# EAGLE board bot (EAGLE 9.6.0)
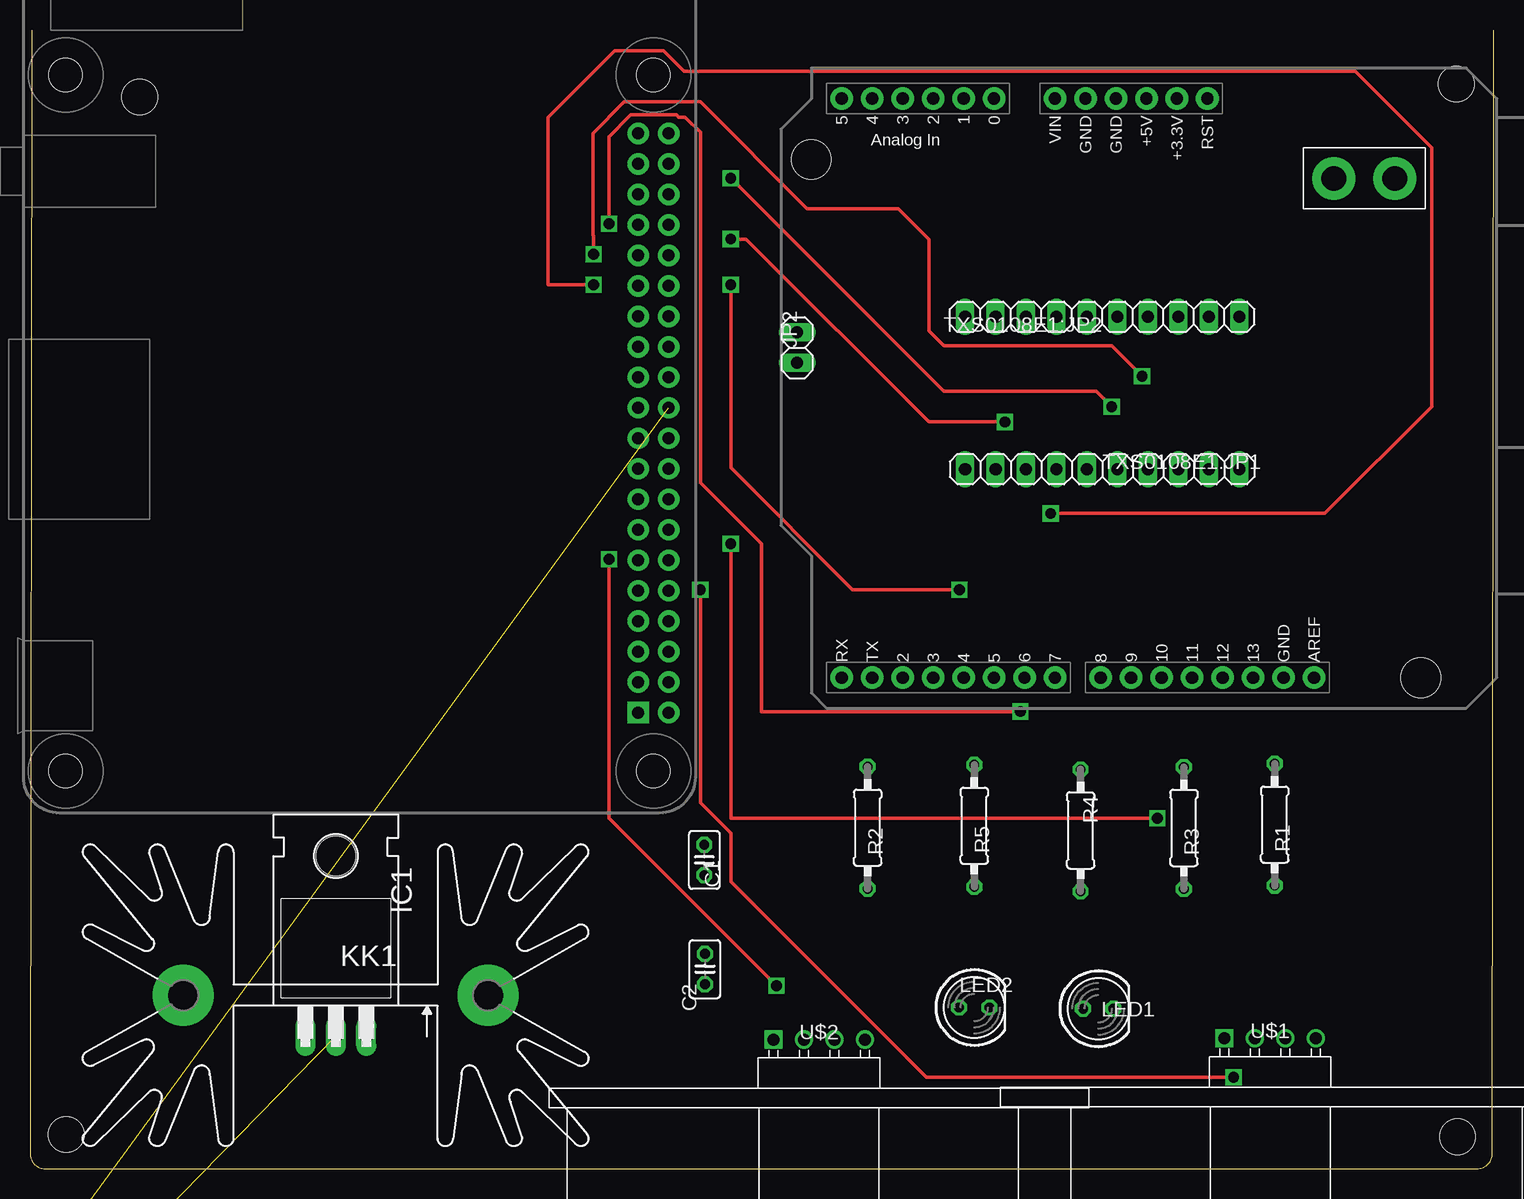
[diagram p0: board, top side]
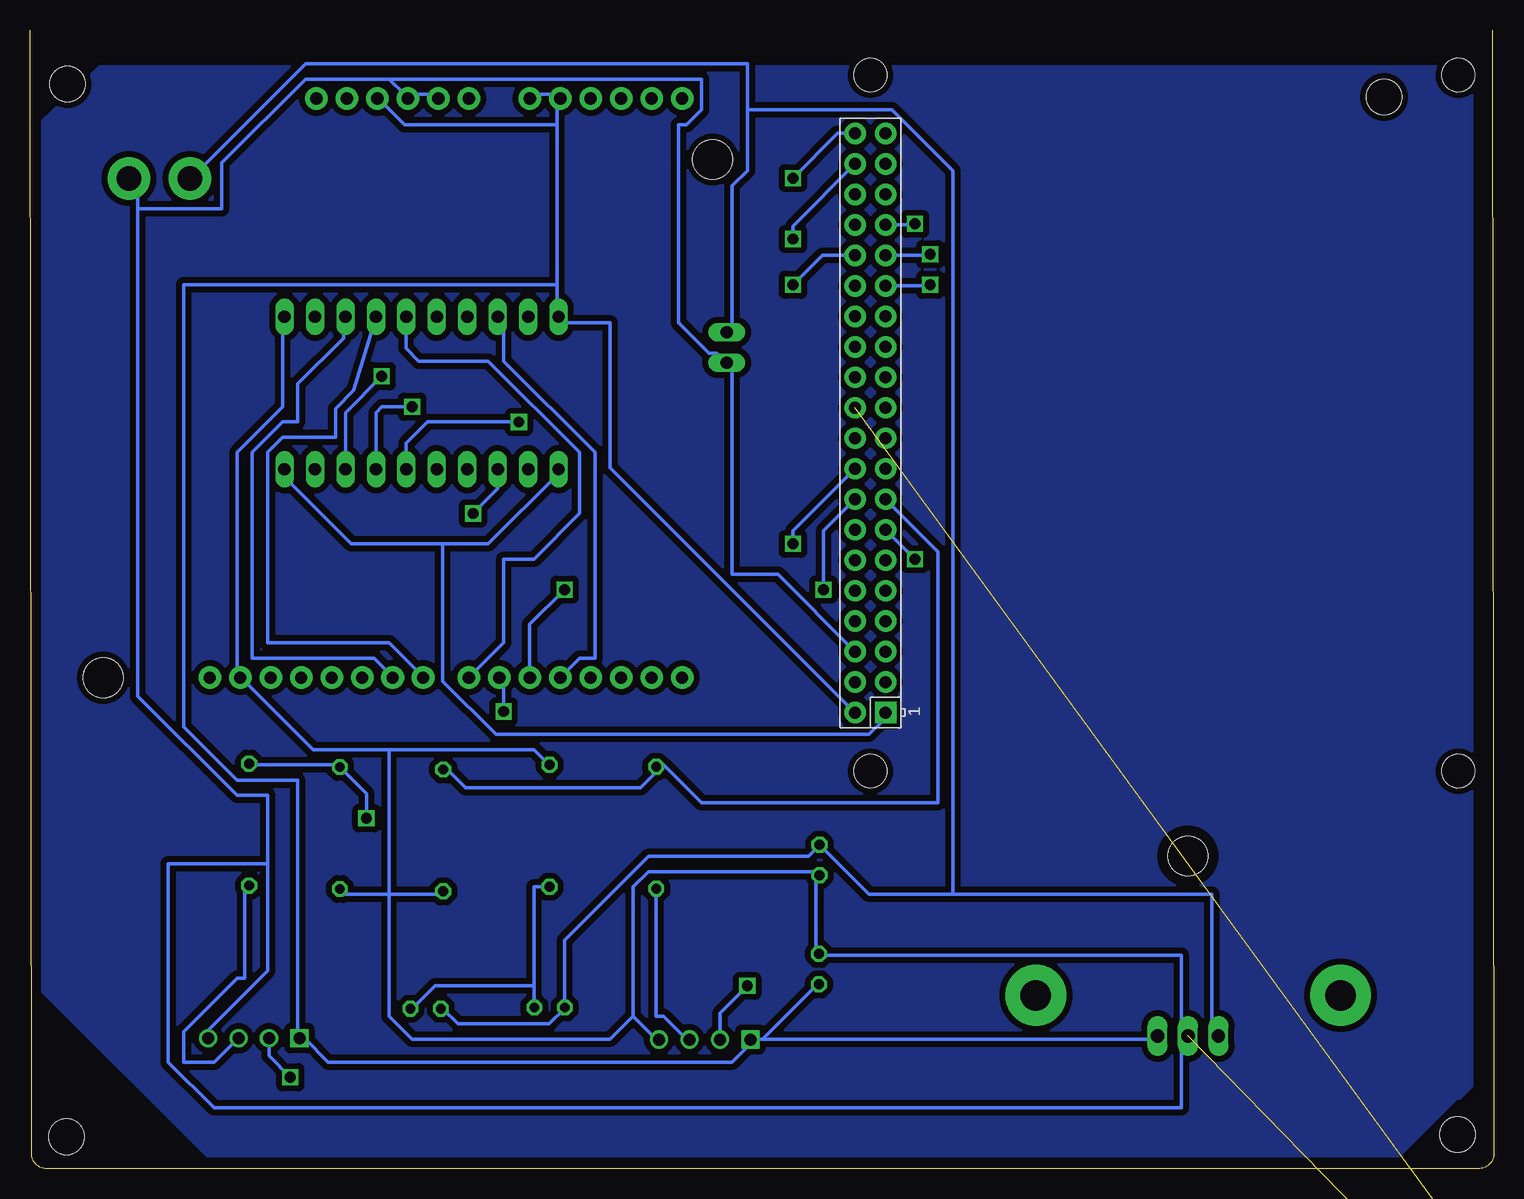
[diagram p1: board, bottom side, seen from below]

Size 122.03 x 94.89 mm. Coordinates in mm from the lower left corner, seen from the top.
Outline: 122.03,94.89 121.9,1.27 arc-90 120.63,0 1.27,0 arc-90 0,1.27 0.13,94.89
Copper layers (1*16): Top 0.035mm / dielectric 1.5mm / Bottom 0.035mm
Design rules "542 *": minimum track width 12mil, minimum drill 0.5mm, track to track 0.5mm, track to pad 0.5mm, pad to pad 0.5mm, via to via 0.5mm, smd to smd 0mil, copper to edge 0.5mm, drill to drill 0.5mm, minimum pad ring 10mil, minimum via ring 8mil, stop-mask expansion 4mil, vias tented up to drill 0mil, thermal gap 10mil
Holes 2.95 mm at 3.02,2.84 9.14,89.31 118.9,90.4 119,2.67

## Footprints (pad centres in the part's own frame; a part is rotated, then mirrored left to right if it is on the bottom)
C025-025X050 = drill 0.813 octagon: 1 -1.27,0; 2 1.27,0
TO220H = drill 1.118 long: 1 -2.54,-10.16; 2 0,-10.16; 3 2.54,-10.16 | hole 3.302: 0,4.826
1X02 = drill 1.016 long: 1 -1.27,0; 2 1.27,0
1X02_XTRA_BIG = drill 2.057 pad 3.556: 1 -2.54,0; 2 2.54,0
SK129 = drill 2.54 pad 5.08: A2,5 -12.7,-0.889; B2,5 12.7,-0.889
LED5MM = drill 0.813 octagon: A -1.27,0; K 1.27,0
RASPI_BOARD_B+_FULL = drill 1 pad 1.778 square: 1 8.37,51.23 | drill 1 pad 1.778: 2 8.37,53.77; 3 10.91,51.23; 4 10.91,53.77; 5 13.45,51.23; 6 13.45,53.77; 7 15.99,51.23; 8 15.99,53.77; 9 18.53,51.23; 10 18.53,53.77; 11 21.07,51.23; 12 21.07,53.77; 13 23.61,51.23; 14 23.61,53.77; 15 26.15,51.23; 16 26.15,53.77; 17 28.69,51.23; 18 28.69,53.77; 19 31.23,51.23; 20 31.23,53.77; 21 33.77,51.23; 22 33.77,53.77; 23 36.31,51.23; 24 36.31,53.77; 25 38.85,51.23; 26 38.85,53.77; 27 41.39,51.23; 28 41.39,53.77; 29 43.93,51.23; 30 43.93,53.77; 31 46.47,51.23; 32 46.47,53.77; 33 49.01,51.23; 34 49.01,53.77; 35 51.55,51.23; 36 51.55,53.77; 37 54.09,51.23; 38 54.09,53.77; 39 56.63,51.23; 40 56.63,53.77 | hole 2.75: 3.5,3.5; 3.5,52.5; 61.5,3.5; 61.5,52.5
0207/10 = drill 0.813 octagon: 1 -5.08,0; 2 5.08,0
1X10 = drill 1.016 long: 1 -11.43,0; 2 -8.89,0; 3 -6.35,0; 4 -3.81,0; 5 -1.27,0; 6 1.27,0; 7 3.81,0; 8 6.35,0; 9 8.89,0; 10 11.43,0
DUEMILANOVE_SHIELD = drill 1.016 pad 1.88: 3.3V 50.8,26.67; 5V 50.8,29.21; A0 50.8,41.91; A1 50.8,44.45; A2 50.8,46.99; A3 50.8,49.53; A4 50.8,52.07; A5 50.8,54.61; AREF 2.54,15.24; D2 2.54,49.53; D3 2.54,46.99; D4 2.54,44.45; D5 2.54,41.91; D6 2.54,39.37; D7 2.54,36.83; D8 2.54,33.02; D9 2.54,30.48; D10 2.54,27.94; D11 2.54,25.4; D12 2.54,22.86; D13 2.54,20.32; GND@0 50.8,31.75; GND@1 50.8,34.29; GND@2 2.54,17.78; RES 50.8,24.13; RX 2.54,54.61; TX 2.54,52.07; VIN 50.8,36.83 | hole 3.302: 45.72,57.15; 2.54,6.35
ULTRASONIC-HC-SR04#V = drill 1 square: 1 -3.81,0 | drill 1: 2 -1.27,0; 3 1.27,0; 4 3.81,0

## Placement (x,y rotation side)
C1  330n  [C025-025X050]  56.21,25.73 270 top
C2  100n  [C025-025X050]  56.26,16.64 90 top
IC1  7805T  [TO220H]  25.5,21.23 0 top
JP2  [1X02]  63.95,68.43 90 top
JP7  SHIELD_PWR  [1X02_XTRA_BIG]  111.23,82.52 0 top
KK1  SK129-PAD  [SK129]  25.48,13.56 180 top
LED1  [LED5MM]  89.05,13.34 0 top
LED2  [LED5MM]  78.71,13.44 0 top
LED3  [LED5MM]  0.71,-10.31 0 top  (outside the outline)
PI  RASPI_BOARD_B+_F  [RASPI_BOARD_B+_FULL]  -0.53,29.64 90 bottom
R1  1k  [0207/10]  103.76,28.68 270 top
R2  1k  [0207/10]  69.82,28.42 270 top
R3  2k  [0207/10]  96.19,28.4 270 top
R4  2k  [0207/10]  87.58,28.19 270 top
R5  10  [0207/10]  78.71,28.57 270 top
R6  100  [0207/10]  3.25,-16.97 0 top  (outside the outline)
TXS0108E1:JP1  [1X10]  89.38,58.29 0 top
TXS0108E1:JP2  [1X10]  89.38,70.99 180 top
U3  ARDUINO_SHIELDLABEL  [DUEMILANOVE_SHIELD]  122.28,38.38 90 top
U$1  ULTRASONIC-HC-SR04#V  [ULTRASONIC-HC-SR04#V]  103.38,10.87 0 top
U$2  ULTRASONIC-HC-SR04#V  [ULTRASONIC-HC-SR04#V]  65.79,10.77 0 top

## Library data of the parts
C1 C2 = rcl; SPICEPREFIX: C
IC1 = linear
JP2 TXS0108E1:JP1 TXS0108E1:JP2 = pinhead
JP7 U3 = SparkFun
KK1 = heatsink
LED1-LED3 = led
PI = raspberrypi_bastelstube_v13
R1-R6 = resistor
U$1 U$2 = diy-modules

## Nets
0: C1.2 C2.2 IC1.2 JP2.1 JP7.2 PI.6 R3.2 R4.2 R5.1 R6.1 TXS0108E1:JP2.1 U3.GND@0 U3.GND@1 U3.GND@2 U$1.4 U$2.4
L_BCK: PI.40 TXS0108E1:JP1.7
L_FWD: PI.38 TXS0108E1:JP1.6
L_SPD: PI.32 U3.D5
L_US_ECHO: PI.18 R1.1 R3.1
L_US_TRIG: PI.16 U$1.2
N$1: R1.2 U$1.3
N$2: R2.2 U$2.3
N$4: LED3.A PI.22
N$5: LED1.K LED2.K R5.2
N$6: LED3.K R6.2
N$13: TXS0108E1:JP2.8 U3.D4
N$14: TXS0108E1:JP2.5 U3.D7
N$15: TXS0108E1:JP2.4 U3.D8
N$16: TXS0108E1:JP2.3 U3.D9
PI_3V3: PI.1 TXS0108E1:JP1.1 TXS0108E1:JP1.10
PI_5V: C2.1 IC1.3 PI.2 TXS0108E1:JP2.10 U3.5V U3.A0 U3.A1 U$1.1 U$2.1
PWR+: C1.1 IC1.1 JP2.2 JP7.1 LED1.A LED2.A
R_BCK: PI.31 TXS0108E1:JP1.8
R_FWD: PI.29 TXS0108E1:JP1.3
R_SPD: PI.33 U3.D6
R_US_ECHO: PI.15 R2.1 R4.1
R_US_TRIG: PI.13 U$2.2
TXS0108E1:A1: TXS0108E1:JP1.2
TXS0108E1:A3: TXS0108E1:JP1.4
TXS0108E1:A4: TXS0108E1:JP1.5
TXS0108E1:A8: TXS0108E1:JP1.9
TXS0108E1:B1: TXS0108E1:JP2.9
TXS0108E1:B3: TXS0108E1:JP2.7
TXS0108E1:B4: TXS0108E1:JP2.6
TXS0108E1:B8: TXS0108E1:JP2.2

## Tracks (layer width: path | path; a pad name or v marks a point on that pad's centre or on a via)
0  (1 unrouted)
  Bottom 0.305: 71.75,12.7 69.85,10.79 U$2.4 | 71.75,12.7 71.75,23.5 70.48,24.77 56.52,24.77 C1.2 56.52,24.13 56.52,18.41 C2.2 55.88,17.78 26.04,17.78 26.04,11.43 IC1.2 26.04,10.79 26.04,5.08 106.68,5.08 110.49,8.89 110.49,25.4 102.23,25.4 | 92.08,22.86 95.89,22.86 R3.2 | 92.08,22.86 87.63,22.86 R4.2 | 92.08,34.92 98.42,34.92 104.14,40.64 U3.GND@2 104.78,41.27 104.78,59.69 100.97,63.5 100.97,70.48 TXS0108E1:JP2.1 | 92.08,34.92 80.01,34.92 78.74,33.66 R5.1 | 92.08,34.92 92.08,22.86 | 71.75,12.7 73.66,10.79 90.17,10.79 92.08,12.7 92.08,22.86 | PI.6 53.34,43.18 59.69,49.53 63.5,49.53 63.5,66.67 JP2.1 64.14,67.31 64.77,67.94 65.41,67.94 67.94,70.48 67.94,87 67.31,87 66.04,88.27 66.04,90.81 92.08,90.81 | U3.GND@1 88.27,89.53 90.17,89.53 U3.GND@0 90.81,89.53 92.08,90.81 | 102.23,25.4 102.23,31.11 104.78,31.11 113.03,39.37 113.03,80.01 | 102.23,25.4 102.23,16.51 107.31,11.43 U$1.4 | 113.03,80.01 113.03,81.92 113.67,81.92 JP7.2 | 92.08,90.81 99.06,90.81 106.05,83.82 106.05,80.01 113.03,80.01
L_BCK  (via drill 0.9)
  Top 0.305: v58.42,82.55 76.2,64.77 88.9,64.77 v90.17,63.5
  Bottom 0.305: PI.40 54.7,86.27 v58.42,82.55 | v90.17,63.5 92.71,63.5 93.19,63.02 TXS0108E1:JP1.7
L_FWD  (via drill 0.9)
  Top 0.305: v58.42,77.47 59.69,77.47 74.93,62.23 v81.28,62.23
  Bottom 0.305: PI.38 58.42,78.55 v58.42,77.47 | v81.28,62.23 88.9,62.23 90.65,60.48 TXS0108E1:JP1.6
L_SPD  (via drill 0.9)
  Top 0.305: v58.42,73.66 58.42,58.42 68.58,48.26 v77.47,48.26
  Bottom 0.305: PI.32 55.97,76.11 v58.42,73.66 | v77.47,48.26 80.37,45.36 U3.D5
L_US_ECHO  (via drill 0.9)
  Top 0.305: v58.42,52.07 58.42,29.21 v93.98,29.21
  Bottom 0.305: R1.1 103.5,33.66 96.52,33.66 R3.1 93.98,31.27 v93.98,29.21 | v58.42,52.07 58.42,53.15 PI.18
L_US_TRIG  (via drill 0.9)
  Top 0.305: v55.88,48.26 55.88,30.48 58.42,27.94 58.42,23.93 74.73,7.62 v100.33,7.62
  Bottom 0.305: PI.16 55.88,53.15 v55.88,48.26 | v100.33,7.62 102.11,9.4 U$1.2
N$1
  Bottom 0.305: R1.2 104.14,23.5 104.14,15.88 104.78,15.88 109.22,11.43 109.22,8.89 106.68,8.89 104.78,10.79 U$1.3
N$2
  Bottom 0.305: R2.2 69.85,22.86 69.85,12.7 69.22,12.7 67.31,10.79 U$2.3
N$3
  pour Bottom: 2.9,5.82 1.83,6.88 1.83,91.24 2.44,91.85 116.2,91.85 120.95,87.33 120.95,14.76 107.26,1.07 7.87,1.07 3,5.94
N$4  (1 unrouted)
N$5
  Bottom 0.305: 80.01,15.24 80.01,23.5 R5.2 | 80.01,15.24 80.01,13.97 LED2.K | 80.01,15.24 88.27,15.24 90.17,13.34 LED1.K
N$6  (1 unrouted)
N$13
  Bottom 0.305: U3.D4 76.2,42.55 74.93,42.55 74.93,59.69 82.55,67.31 82.55,70.48 TXS0108E1:JP2.8
N$14
  Bottom 0.305: U3.D7 82.55,43.81 82.55,50.8 80.01,50.8 76.2,54.61 76.2,59.69 83.82,67.31 89.63,67.31 90.65,68.39 TXS0108E1:JP2.5
N$15
  Bottom 0.305: U3.D8 89.53,41.27 92.08,43.81 102.23,43.81 102.23,59.69 100.97,60.96 96.54,60.96 96.54,63.35 95.03,64.85 TXS0108E1:JP2.4
N$16
  Bottom 0.305: TXS0108E1:JP2.3 95.89,70.48 95.89,69.22 99.69,65.41 99.69,62.23 100.97,62.23 103.5,59.69 103.5,42.55 93.34,42.55 92.08,41.27 U3.D9
PI_3V3
  Bottom 0.305: 87.63,52.07 95.25,52.07 100.97,57.78 TXS0108E1:JP1.10 | 87.63,52.07 83.82,52.07 78.11,57.78 TXS0108E1:JP1.1 | 87.63,52.07 87.63,40.64 83.19,36.2 52.07,36.2 50.8,37.47 PI.1
PI_5V
  Bottom 0.305: 60.96,10.79 56.52,15.24 C2.1 | 60.96,10.79 61.59,10.79 U$2.1 62.23,10.16 63.5,8.89 97.16,8.89 99.06,10.79 U$1.1 99.69,11.43 99.69,32.38 104.78,32.38 109.22,36.83 109.22,73.66 78.11,73.66 | 60.96,10.79 28.57,10.79 IC1.3 | 78.11,87 78.11,88.9 U3.A1 78.11,89.53 80.01,89.53 U3.A0 | 78.11,87 78.11,73.66 | 78.11,73.66 78.11,71.12 TXS0108E1:JP2.10 77.47,70.48 73.66,70.48 73.66,58.42 53.34,38.1 PI.2 | 78.11,87 90.81,87 92.71,88.9 U3.5V
PWR+
  Bottom 0.305: 62.23,88.27 62.23,92.08 99.06,92.08 108.58,82.55 JP7.1 | 62.23,88.27 62.23,83.19 63.5,81.92 63.5,69.85 JP2.2 | LED1.A 87.63,13.34 86.36,12.06 78.74,12.06 77.47,13.34 LED2.A 77.47,13.97 77.47,19.05 70.48,26.04 57.15,26.04 56.52,26.67 C1.1 52.07,22.86 45.09,22.86 | 45.09,22.86 23.5,22.86 23.5,11.43 IC1.1 | 62.23,88.27 50.16,88.27 45.09,83.19 45.09,22.86
R_BCK  (via drill 0.9)
  Top 0.305: v46.99,76.2 46.99,77.74 46.93,77.8 46.93,86.3 49.53,88.9 55.88,88.9 64.77,80.01 72.39,80.01 74.93,77.47 74.93,69.85 76.2,68.58 90.17,68.58 v92.71,66.04
  Bottom 0.305: PI.31 47.08,76.11 v46.99,76.2 | v92.71,66.04 95.73,63.02 TXS0108E1:JP1.8
R_FWD  (via drill 0.9)
  Top 0.305: v46.99,73.66 43.18,73.66 43.18,87.63 48.72,93.17 52.81,93.17 54.54,91.44 110.49,91.44 116.84,85.09 116.84,63.5 107.95,54.61 v85.09,54.61
  Bottom 0.305: PI.29 47.08,73.57 v46.99,73.66 | v85.09,54.61 83.03,56.67 TXS0108E1:JP1.3
R_SPD  (via drill 0.9)
  Top 0.305: v48.26,78.74 48.26,86.02 50.06,87.81 53.88,87.81 54.06,87.63 54.61,87.63 55.88,86.36 55.88,57.15 60.96,52.07 60.96,38.1 v82.55,38.1
  Bottom 0.305: PI.33 48.35,78.65 v48.26,78.74 | v82.55,38.1 82.55,40.56 U3.D6
R_US_ECHO
  Bottom 0.305: R4.1 87,33.02 85.72,31.75 71.12,31.75 69.85,33.02 R2.1 69.22,33.66 66.04,30.48 46.35,30.48 46.35,51.44 50.16,55.24 PI.15
R_US_TRIG  (via drill 0.9)
  Top 0.305: v48.26,50.8 48.26,29.21 v62.23,15.24
  Bottom 0.305: PI.13 50.7,53.24 v48.26,50.8 | v62.23,15.24 64.52,12.95 U$2.2